# Altium PCB StarterMotor.PcbDoc
Units mm, origin at the board's own origin, x right, y up, seen from the top; angles counter-clockwise.
Board outline 69.6 x 49.4 mm, 2 copper layers (Top Layer, Bottom Layer); 5 components, 7 nets, 44 pads, 1 vias.
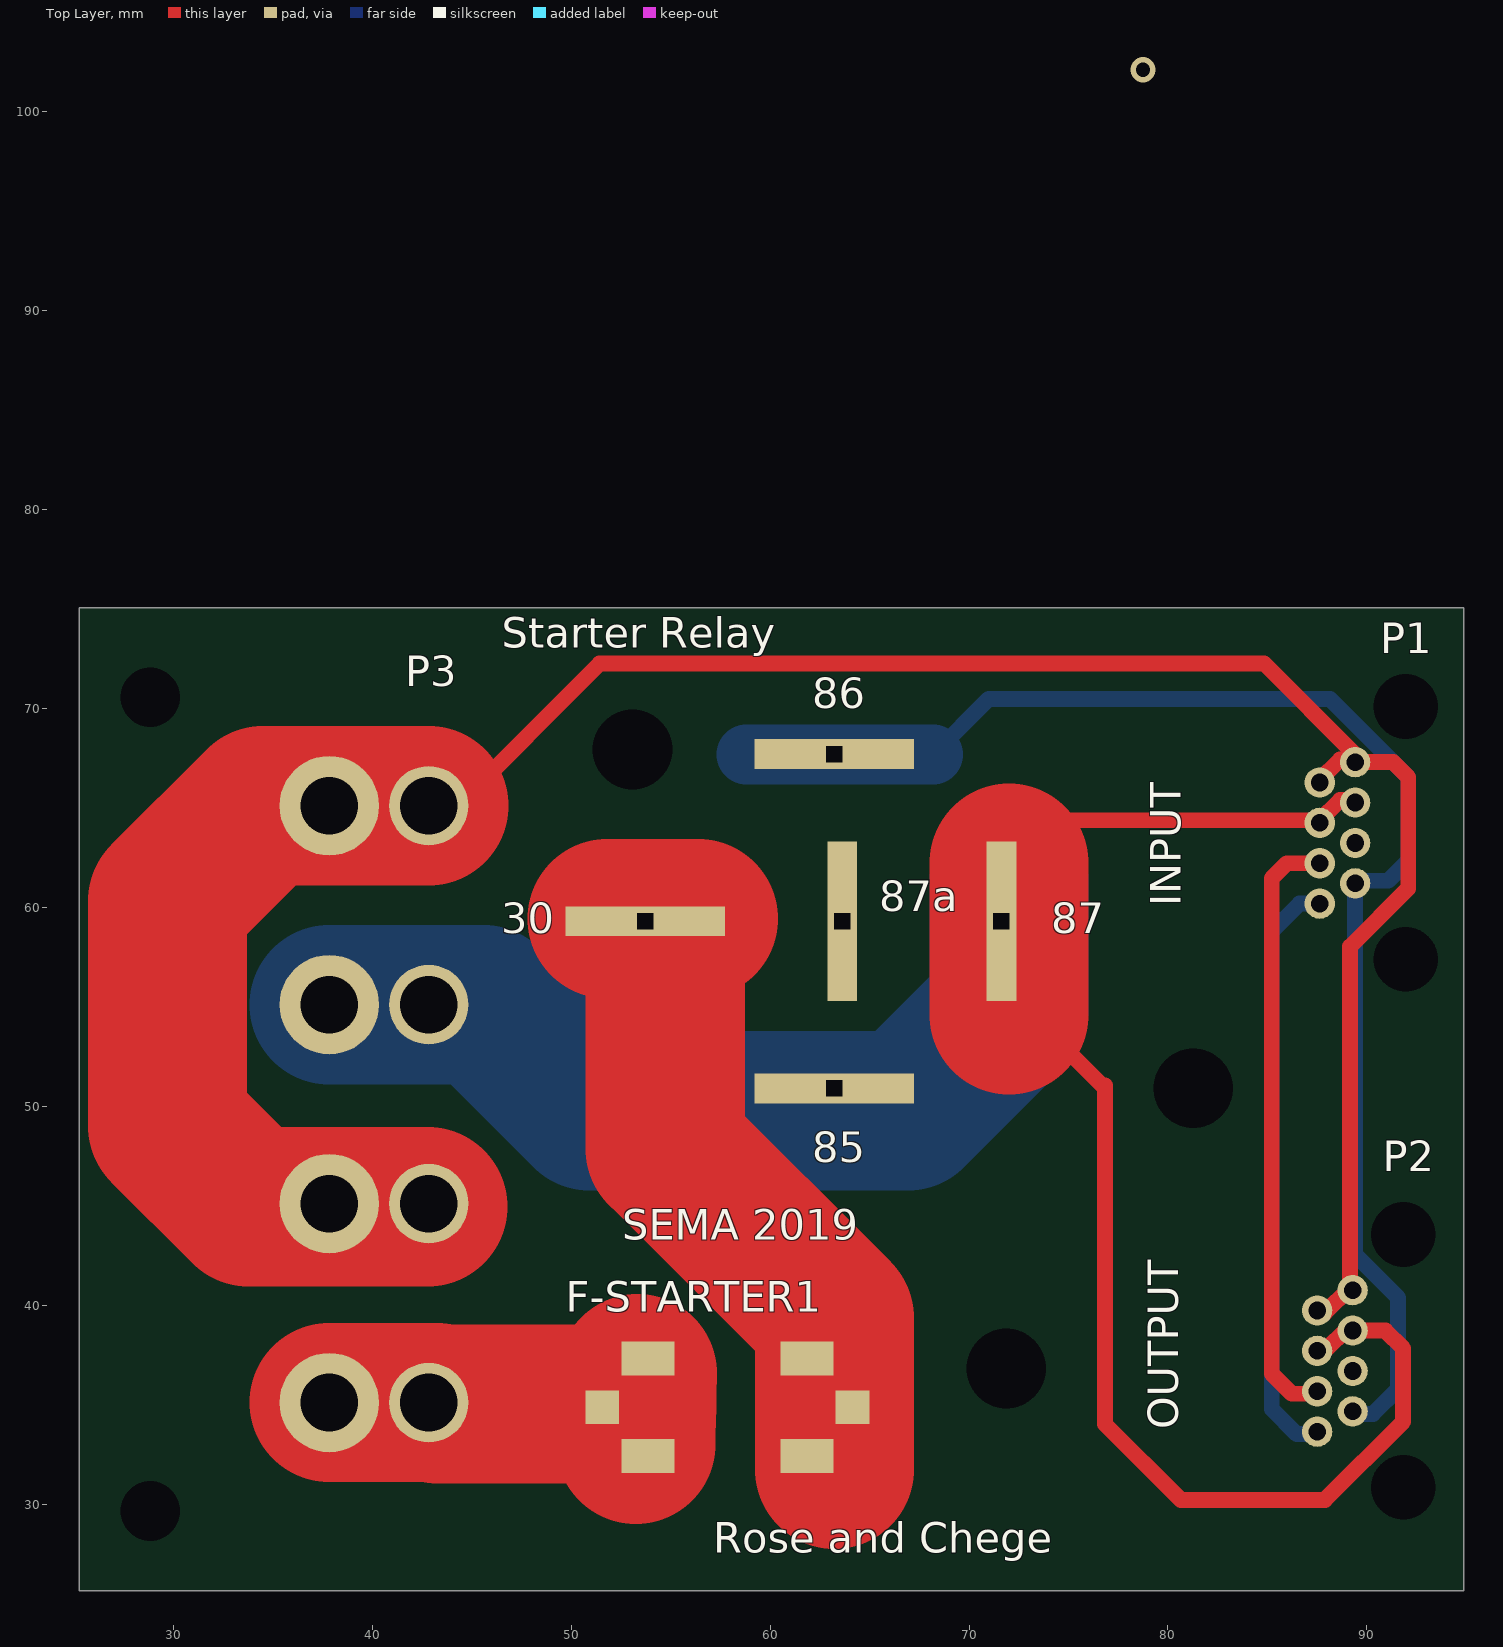
[diagram p0: Top Layer view]
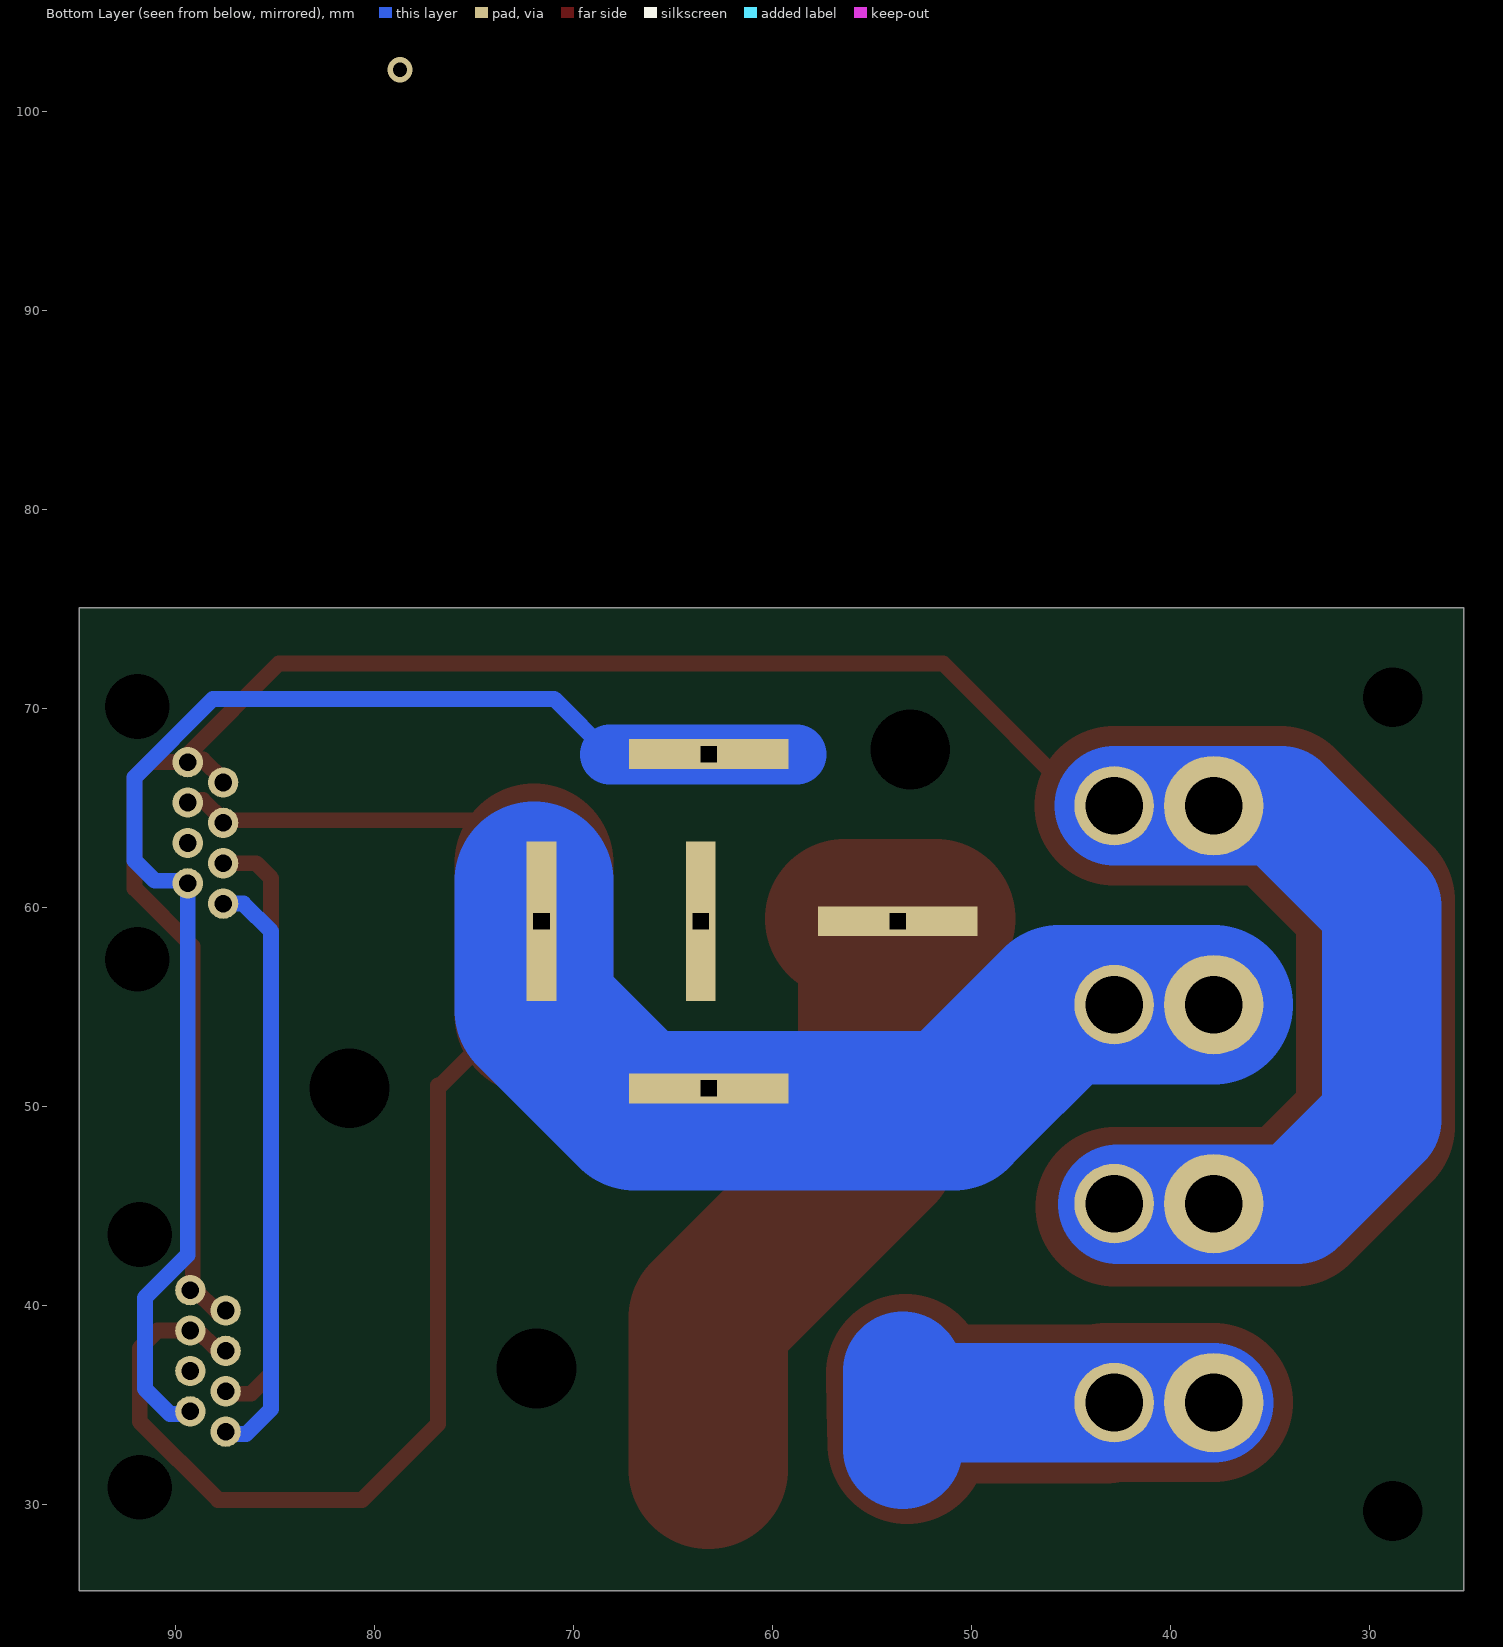
[diagram p1: Bottom Layer view, seen from below]

## Layer stack, top to bottom
Top Solder: solder mask 0.0102, Solder Resist, Dk 3.5
Top Layer: signal copper 0.0356
Dielectric 1: dielectric 0.32, FR-4, Dk 4.8
Bottom Layer: signal copper 0.0356
Bottom Solder: solder mask 0.0102, Solder Resist, Dk 3.5

## Board outline
25.273,25.654 25.273,75.057 94.869,75.057 94.869,25.654

## Design rules (kind name [scope] priority, off if disabled: settings)
Clearance [All] p1: gap=0.1 ignorepadtopadclearanceinfootprint=FALSE except(0: Arc-Hole Track-Hole SMDPad-Hole THPad-Hole Via-Hole Fill-Hole Poly-Hole Region-Hole Text-Hole; 0.254: Arc-Text Track-Text SMDPad-Text THPad-Text Via-Via Via-Fill Via-Poly Via-Region Via-Text Fill-Text Poly-Text Region-Text Text-Text)
PolygonConnect [All] p1: connectstyle=Relief reliefconductorwidth=0.254 reliefentries=4 polygonreliefangle="90 Angle" airgapwidth=0.254
RoutingVias [All] p1: holewidth=0.711 width=1.27 viastyle="Through Hole" minholewidth=0.711 minwidth=1.27 maxholewidth=0.711 maxwidth=1.27
SolderMaskExpansion [All] p1: expansion=0.102
Width [All] p1: maxlimit=10 minlimit=0.254 preferedwidth=0.254 minimp=50.000000 maximp=50.000000 favimp=50.000000
30 further rules are at their usual default settings.

## Components (designator, comment, footprint, x,y, rotation, side; value= is the part's Value field where it differs from the comment)
F-STARTER1 "Fuse 1" "SML FUSE HOLDER" 53.859,32.438 r0 top
P1 "Header 8" RJHSE-5080 91.948,57.406 r90 top
P2 "Header 8" RJHSE-5080 91.821,30.867 r90 top
P3 "Header 4" "4-PIN Molex" 42.846,29.668 r90 top
"Starter Relay" "Relay-SPST" "Automotive Relay" 63.627,59.309 r0 top

## Footprints (in the part's own frame and the unit in brackets; to place one, negate y for a bottom-side part, rotate by r counter-clockwise, add the part's x,y. Pads: shape width x height; smd on the part's side, far side on the other; paste and mask are expansions set on the pad)
"4-PIN Molex" [mm] "4-pin molex"
  round 0 hole 3: 0(0,14) 0(40.9,14)
  round 4 hole 2.9: 1(5.45,0) 2(15.45,0) 3(25.45,0) 4(35.45,0)
  round 5 hole 2.9: 1(5.45,5) 2(15.45,5) 3(25.45,5) 4(35.45,5)
"Automotive Relay" [mm]
  rect 1.5x8 hole 0.81 square: 3(0,0) 87(8,0)
  rect 8x1.5 hole 0.81 square: 30(-9.9,0) 85(-0.4,-8.4) 86(-0.4,8.4)
RJHSE-5080 [mm] "Ethernet Connector - Lighter"
  round 1.524 hole 0.89: 1(9.9,2.54) 2(8.88,4.32) 3(7.87,2.54) 4(6.85,4.32) 5(5.84,2.54) 6(4.82,4.32) 7(3.81,2.54) 8(2.79,4.32)
  round 1.524 hole 3.25: ""(0,0) ""(12.7,0)
"SML FUSE HOLDER" [mm]
  rect 1.7x1.7 smd: 1(-2.29,2.45) 2(10.28,2.45)
  rect 2.66x1.7 smd: 1(0,0) 1(0,4.9) 2(7.99,0) 2(7.99,4.9)

## Part data
F-STARTER1: "Fuse", LatestRevisionDate=17-Jul-2002, LatestRevisionNote="Re-released for DXP Platform.", PackageDescription="Thru-Hole; 2 Leads", PackageReference=PIN-W2/E2.8, Published=8-Jun-2000, Publisher="Altium Limited"
P1 P2: "Header, 8-Pin", LatestRevisionDate=17-Jul-2002, LatestRevisionNote="Re-released for DXP Platform.", Publisher="Altium Limited"
P3: "Header, 4-Pin", LatestRevisionDate=17-Jul-2002, LatestRevisionNote="Re-released for DXP Platform.", Publisher="Altium Limited"
"Starter Relay": "Single-Pole Single-Throw Relay", LatestRevisionDate=17-Jul-2002, LatestRevisionNote="Re-released for DXP Platform.", PackageReference=MODULE4, Published=24-Mar-1999, Publisher="Altium Limited"

## Free pads (board coordinates)
  round 1.524 hole 4: 2(81.28,50.927) 3(53.086,67.945) 4(71.882,36.83)

## Via types
v1: diameter 1.27, hole 0.711, Top Layer to Bottom Layer, 1 vias

## Nets (pads, with @x,y where several pads share a name; then routed paths per layer and width w, separated by ;. In a path a pad name is that pad's centre, name@x,y a point inside that pad or via, vN(x,y) a via of type N, cw(c..) or ccw(c..) an arc to the next point about the centre after c; other vN are vias at no path point)
GND: "Starter Relay.85" "Starter Relay.87" P1.3 P1.4 P2.3 P2.4 P3.3 | length 121
  Top Layer w0.8: 71.628,64.389 87.632,64.389 88.65,65.407 P1.3@89.41,65.407 ; 72.009,55.753 76.835,50.927 ; 76.835,51.054 76.835,34.036 80.645,30.226 87.884,30.226 91.821,34.163 91.821,37.846 90.93,38.737 P2.3 ; P2.4@87.882,37.717 P2.3@89.027,38.862
  Top Layer w8: 72.009,54.61 72.009,62.23
  Bottom Layer w8: P3.3@37.846,55.118 42.846,55.118 45.593,55.118 50.927,49.784 66.929,49.784 72.009,54.864 72.009,61.341
NetF-STARTER1_1: F-STARTER1.1 P3.1 | length 37.9
  Top Layer w8: P3.1@37.846,35.118 42.846,35.118 P3.1@43.246,35.118 ; P3.1@43.307,35.052 53.213,35.052 ; F-STARTER1.1@53.251,33.019 53.297,34.845 F-STARTER1.1@53.34,36.576
  Bottom Layer w6: P3.1@37.846,35.118 52.898,35.118 ; 53.467,32.766 53.467,36.703
NetF-STARTER1_2: "Starter Relay.30" F-STARTER1.2 | length 34.5
  Top Layer w8: 51.816,59.436 56.388,59.436 ; 54.737,58.166 54.737,47.879 63.246,39.37 63.246,34.888 63.246,31.75
NetP1_6: P1.6 P2.6 | length 30.2
  Top Layer w0.8: P2.6@87.376,35.564 86.229,35.564 85.217,36.576 85.217,61.468 85.975,62.226 P1.6
NetP1_7: "Starter Relay.86" P1.7 P2.7 | length 72.7
  Bottom Layer w0.8: 68.199,67.691 70.993,70.485 88.138,70.485 92.075,66.548 92.075,62.357 91.065,61.347 89.41,61.347 89.41,42.543 91.567,40.386 91.567,35.814 90.307,34.554 P2.7@89.156,34.554
  Bottom Layer w3: 58.801,67.691 68.199,67.691
NetP1_8: P1.8 P2.8 | length 29.7
  Bottom Layer w0.8: P2.8@87.376,33.534 86.481,33.534 85.217,34.798 85.217,58.166 85.217,58.801 86.612,60.196 P1.8
VCC: P1.1 P1.2 P2.1 P2.2 P3.2 P3.4 | length 167.2
  Top Layer w0.8: P3.4@44.196,65.024 51.435,72.263 84.836,72.263 89.41,67.689 89.41,67.437 88.646,67.437 P1.2@87.63,66.421 ; P2.2@87.376,39.624 87.884,39.624 89.156,40.896 89.156,58.041 92.075,60.96 92.075,66.548 91.317,67.306 P1.1
  Top Layer w8: P3.2@42.799,44.958 33.782,44.958 29.718,49.022 29.718,60.325 34.511,65.118 37.846,65.118 P3.4@42.846,65.118
  Bottom Layer w6: P3.2@42.672,45.085 33.655,45.085 29.403,49.337 29.403,60.071 34.45,65.118 P3.4@42.846,65.118
pads on no net: "Starter Relay.3" P1. P1.5 P2. P2.5 P3.0
copper on no net:
  other v1: 78.74,102.108

## Silkscreen, mask and mechanical layers (free items; w line width, h text height)
Top Overlay:
  text "INPUT" at 80.645,60.071 h1.52 r90
  text "SEMA 2019" at 52.578,43.307 h1.52
  text "OUTPUT" at 80.518,33.782 h1.52 r90
  text "Rose and Chege" at 57.15,27.559 h1.52
Mechanical 1:
  the board outline again, w0.254

## Text inside footprints (layer, text, board x,y; h text height)
"Starter Relay": Top Overlay "87a" at 65.477,59.809 h1.52; Top Overlay "85" at 62.127,47.209 h1.52; Top Overlay "86" at 62.127,70.009 h1.52; Top Overlay "87" at 74.127,58.709 h1.52; Top Overlay "30" at 46.502,58.709 h1.52